# Altium PCB 20key.PcbDoc
Units mil, origin at the board's own origin, x right, y up, seen from the top; angles counter-clockwise.
Board outline 3000.01 x 4781.36 mil, 2 copper layers (Top Layer, Bottom Layer); 107 components, 117 nets, 460 pads, 115 vias.
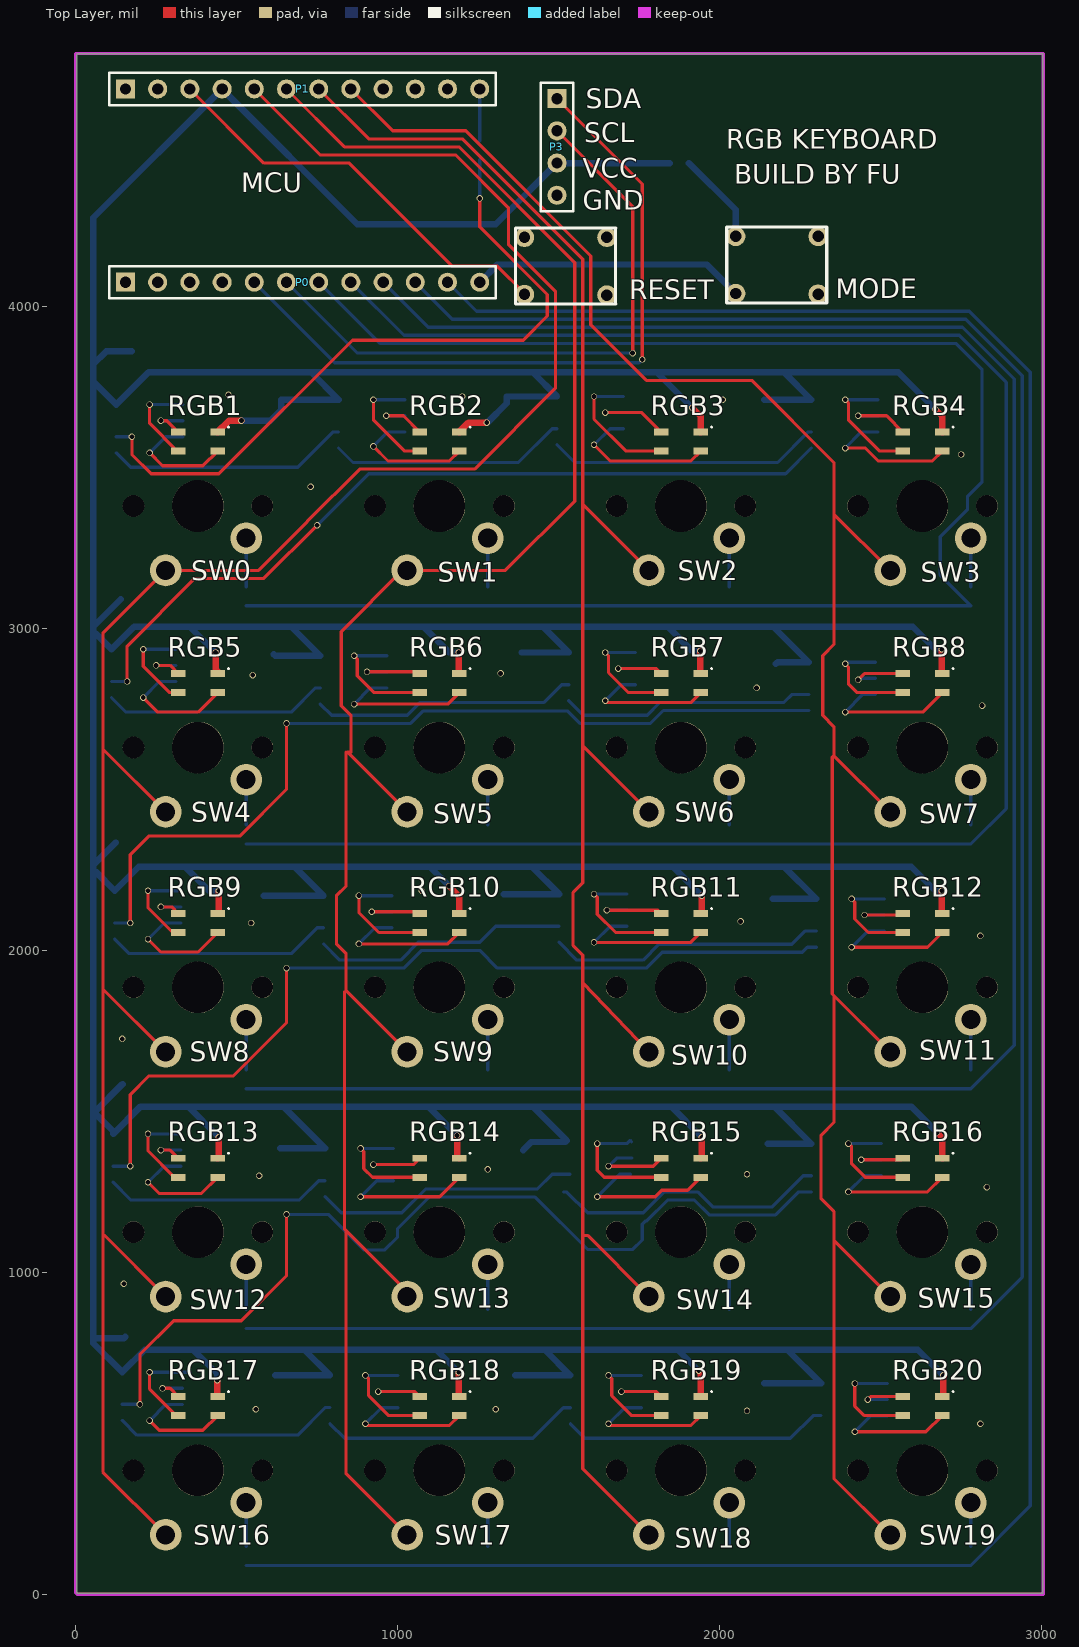
[diagram p0: Top Layer view]
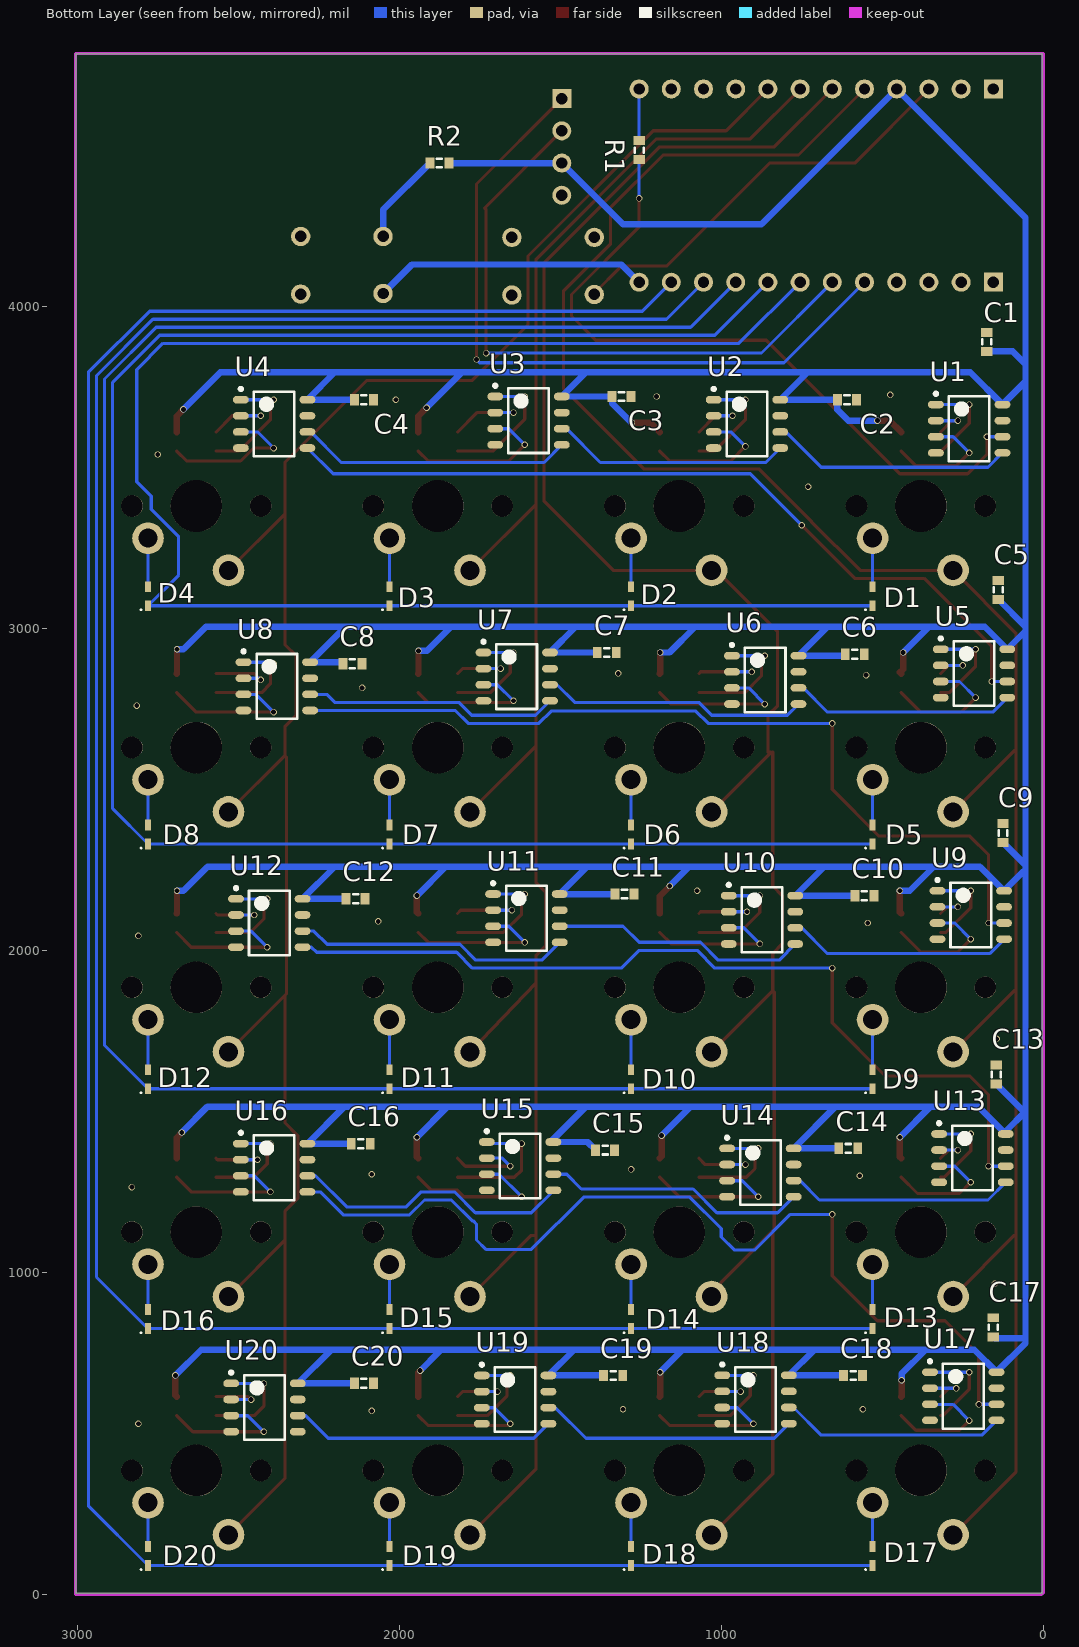
[diagram p1: Bottom Layer view, seen from below]

## Layer stack, top to bottom
Top Solder: solder mask 0.4, Solder Resist, Dk 3.5
Top Layer: signal copper 1.4
Dielectric 1: dielectric 12.6, FR-4, Dk 4.8
Bottom Layer: signal copper 1.4
Bottom Solder: solder mask 0.4, Solder Resist, Dk 3.5

## Board outline
3.74,3753.64 3.74,4785 3003.75,4785 3003.75,3.63 3.74,3.63

## Design rules (kind name [scope] priority, off if disabled: settings)
Clearance [All] p1: gap=15 ignorepadtopadclearanceinfootprint=TRUE
ComponentClearance [All] p1 off: gap=10 collisioncheckmode=3 verticalgap=10 showdistances=FALSE
PolygonConnect [All] p1: connectstyle=Relief reliefconductorwidth=10 reliefentries=4 polygonreliefangle="90 Angle" airgapwidth=10
RoutingVias [All] p1: holewidth=10 width=6 viastyle="Through Hole" minholewidth=10 minwidth=6 maxholewidth=10 maxwidth=6
SolderMaskExpansion [All] p1: expansion=4
Width [All] p1: maxlimit=50 minlimit=6 preferedwidth=10
29 further rules are at their usual default settings.

## Components (designator, comment, footprint, x,y, rotation, side; value= is the part's Value field where it differs from the comment)
C1 "C" PCBComponent_1#1 175,3890 r90 bottom value=100nF
C2 "C" PCBComponent_1#1 609.06,3710 r180 bottom value=100nF
C3 "C" PCBComponent_1#1 1309.06,3720 r180 bottom value=100nF
C4 "C" PCBComponent_1#1 2109.06,3710 r180 bottom value=100nF
C5 "C" PCBComponent_1#1 140,3120 r90 bottom value=100nF
C6 "C" PCBComponent_1#1 585,2920 r180 bottom value=100nF
C7 "C" PCBComponent_1#1 1355,2925 r180 bottom value=100nF
C8 "C" PCBComponent_1#1 2145,2890 r180 bottom value=100nF
C9 "C" PCBComponent_1#1 125,2365 r90 bottom value=100nF
C10 "C" PCBComponent_1#1 555,2170 r180 bottom value=100nF
C11 "C" PCBComponent_1#1 1300,2175 r180 bottom value=100nF
C12 "C" PCBComponent_1#1 2135,2160 r180 bottom value=100nF
C13 "C" PCBComponent_1#1 145.95,1615 r90 bottom value=100nF
C14 "C" PCBComponent_1#1 605,1385 r180 bottom value=100nF
C15 "C" PCBComponent_1#1 1360,1380 r180 bottom value=100nF
C16 "C" PCBComponent_1#1 2119.06,1400 r180 bottom value=100nF
C17 "C" PCBComponent_1#1 155,830 r90 bottom value=100nF
C18 "C" PCBComponent_1#1 590,680 r180 bottom value=100nF
C19 "C" PCBComponent_1#1 1335,680 r180 bottom value=100nF
C20 "C" PCBComponent_1#1 2109.06,655.47 r180 bottom value=100nF
D1 "Diode" SODFL160X77-2M 530,3100 r90 bottom
D2 "Diode" SODFL160X77-2M 1280,3100 r90 bottom
D3 "Diode" SODFL160X77-2M 2030,3100 r90 bottom
D4 "Diode" SODFL160X77-2M 2780,3100 r90 bottom
D5 "Diode" SODFL160X77-2M 530,2360 r90 bottom
D6 "Diode" SODFL160X77-2M 1280,2360 r90 bottom
D7 "Diode" SODFL160X77-2M 2030,2360 r90 bottom
D8 "Diode" SODFL160X77-2M 2780,2360 r90 bottom
D9 "Diode" SODFL160X77-2M 530,1600 r90 bottom
D10 "Diode" SODFL160X77-2M 1280,1600 r90 bottom
D11 "Diode" SODFL160X77-2M 2030,1600 r90 bottom
D12 "Diode" SODFL160X77-2M 2780,1600 r90 bottom
D13 "Diode" SODFL160X77-2M 530,855 r90 bottom
D14 "Diode" SODFL160X77-2M 1280,855 r90 bottom
D15 "Diode" SODFL160X77-2M 2030,855 r90 bottom
D16 "Diode" SODFL160X77-2M 2780,855 r90 bottom
D17 "Diode" SODFL160X77-2M 530,119.53 r90 bottom
D18 "Diode" SODFL160X77-2M 1280,119.53 r90 bottom
D19 "Diode" SODFL160X77-2M 2030,119.53 r90 bottom
D20 "Diode" SODFL160X77-2M 2780,119.53 r90 bottom
MODE "key" PCBComponent_1#2 2022.44,4010.47 r0 top
P0 "Header 12" HDR1X12 155,4075 r0 top
P1 "Header 12" HDR1X12 155,4675 r0 top
P3 "Header 4" HDR1X4 1495,4645 r270 top
R1 "Res3" J1-0603 1255,4485 r270 bottom value=1K
R2 "Res3" J1-0603 1875,4445 r0 bottom value=1K
RESET "key" PCBComponent_1#2 1366.54,4007.44 r0 top (schematic designator reset)
RGB1 "1206RGB" CAC-150P150X300-4M 380,3580 r0 top
RGB2 "1206RGB" CAC-150P150X300-4M 1130,3580 r0 top
RGB3 "1206RGB" CAC-150P150X300-4M 1880,3580 r0 top
RGB4 "1206RGB" CAC-150P150X300-4M 2630,3580 r0 top
RGB5 "1206RGB" CAC-150P150X300-4M 380,2830 r0 top
RGB6 "1206RGB" CAC-150P150X300-4M 1130,2830 r0 top
RGB7 "1206RGB" CAC-150P150X300-4M 1880,2830 r0 top
RGB8 "1206RGB" CAC-150P150X300-4M 2630,2830 r0 top
RGB9 "1206RGB" CAC-150P150X300-4M 380,2085 r0 top
RGB10 "1206RGB" CAC-150P150X300-4M 1130,2085 r0 top
RGB11 "1206RGB" CAC-150P150X300-4M 1880,2085 r0 top
RGB12 "1206RGB" CAC-150P150X300-4M 2630,2085 r0 top
RGB13 "1206RGB" CAC-150P150X300-4M 380,1325 r0 top
RGB14 "1206RGB" CAC-150P150X300-4M 1130,1325 r0 top
RGB15 "1206RGB" CAC-150P150X300-4M 1880,1325 r0 top
RGB16 "1206RGB" CAC-150P150X300-4M 2630,1325 r0 top
RGB17 "1206RGB" CAC-150P150X300-4M 380,585 r0 top
RGB18 "1206RGB" CAC-150P150X300-4M 1130,585 r0 top
RGB19 "1206RGB" CAC-150P150X300-4M 1880,585 r0 top
RGB20 "1206RGB" CAC-150P150X300-4M 2630,585 r0 top
SW0 "MX_SW" MX_SW-4 380,3380 r0 top
SW1 "MX_SW" MX_SW-4 1130,3380 r0 top
SW2 "MX_SW" MX_SW-4 1880,3380 r0 top
SW3 "MX_SW" MX_SW-4 2630,3380 r0 top
SW4 "MX_SW" MX_SW-4 380,2630 r0 top
SW5 "MX_SW" MX_SW-4 1130,2630 r0 top
SW6 "MX_SW" MX_SW-4 1880,2630 r0 top
SW7 "MX_SW" MX_SW-4 2630,2630 r0 top
SW8 "MX_SW" MX_SW-4 380,1885 r0 top
SW9 "MX_SW" MX_SW-4 1130,1885 r0 top
SW10 "MX_SW" MX_SW-4 1880,1885 r0 top
SW11 "MX_SW" MX_SW-4 2630,1885 r0 top
SW12 "MX_SW" MX_SW-4 380,1125 r0 top
SW13 "MX_SW" MX_SW-4 1130,1125 r0 top
SW14 "MX_SW" MX_SW-4 1880,1125 r0 top
SW15 "MX_SW" MX_SW-4 2630,1125 r0 top
SW16 "MX_SW" MX_SW-4 380,385 r0 top
SW17 "MX_SW" MX_SW-4 1130,385 r0 top
SW18 "MX_SW" MX_SW-4 1880,385 r0 top
SW19 "MX_SW" MX_SW-4 2630,385 r0 top
U1 "TM1913" SOP127P600X175-8L 230,3620 r180 bottom
U2 "TM1913" SOP127P600X175-8L 920,3635 r180 bottom
U3 "TM1913" SOP127P600X175-8L 1598.35,3645 r180 bottom
U4 "TM1913" SOP127P600X175-8L 2388.35,3635 r180 bottom
U5 "TM1913" SOP127P600X175-8L 215,2860 r180 bottom
U6 "TM1913" SOP127P600X175-8L 863.35,2840 r180 bottom
U7 "TM1913" SOP127P600X175-8L 1635,2850 r180 bottom
U8 "TM1913" SOP127P600X175-8L 2380,2820 r180 bottom
U9 "TM1913" SOP127P600X175-8L 225,2110 r180 bottom
U10 "TM1913" SOP127P600X175-8L 873.35,2095 r180 bottom
U11 "TM1913" SOP127P600X175-8L 1605,2100 r180 bottom
U12 "TM1913" SOP127P600X175-8L 2403.35,2085 r180 bottom
U13 "TM1913" SOP127P600X175-8L 220,1355 r180 bottom
U14 "TM1913" SOP127P600X175-8L 878.35,1310 r180 bottom
U15 "TM1913" SOP127P600X175-8L 1624.51,1330 r180 bottom
U16 "TM1913" SOP127P600X175-8L 2388.35,1325 r180 bottom
U17 "TM1913" SOP127P600X175-8L 248.35,615.47 r180 bottom
U18 "TM1913" SOP127P600X175-8L 893.35,605.47 r180 bottom
U19 "TM1913" SOP127P600X175-8L 1640,605 r180 bottom
U20 "TM1913" SOP127P600X175-8L 2418.35,580.47 r180 bottom

## Footprints (in the part's own frame and the unit in brackets; to place one, negate y for a bottom-side part, rotate by r counter-clockwise, add the part's x,y. Pads: shape width x height; smd on the part's side, far side on the other; paste and mask are expansions set on the pad)
CAC-150P150X300-4M [mm] "Chip Array, Concave, 4-Leads, Pitch 1.50mm,  Body 1.50x3.00mm,  IPC Low Density"
  rect 1.15x0.55 smd: 1(1.55,0.75) 2(1.55,-0.75) 3(-1.55,0.75) 4(-1.55,-0.75)
  silkscreen extent 2.36,1.09 2.46,1.19, body extent -1.55,-0.8 1.55,0.8, height 0.7
HDR1X4 [mm] "Connector; Header; 4 Position"
  rect 1.5x1.5 hole 0.9: 1(0,0)
  round 1.5 hole 0.9: 2(2.54,0) 3(5.08,0) 4(7.62,0)
  silkscreen extent -1.27,-1.27 8.89,1.27
HDR1X12 [mm] "Connector; Header; 12 Position"
  rect 1.5x1.5 hole 0.9: 1(0,0)
  round 1.5 hole 0.9: 2(2.54,0) 3(5.08,0) 4(7.62,0) 5(10.16,0) 6(12.7,0) 7(15.24,0) 8(17.78,0) 9(20.32,0) 10(22.86,0) 11(25.4,0) 12(27.94,0)
  silkscreen extent -1.27,-1.27 29.21,1.27
J1-0603 [mm] "Chip Resistor, Body 1.6x0.8mm, IPC High Density"
  rect 0.7x0.9 smd: 1(-0.75,0) 2(0.75,0)
  silkscreen extent -0.2,-0.35 0.2,0.35, body extent -0.85,-0.48 0.85,0.48, height 0.9
MX_SW-4 [mil] "with Fixation pins  1-Pole"
  round 98.43 hole 59.06: 1(150,-100) 2(-100,-200)
  round 67 hole 67: ""(-200,0) ""(200,0)
  round 160 hole 160: ""(0,0)
PCBComponent_1#1 [mm]
  rect 0.7x0.9 smd: 1(-0.762,0) 2(0.738,0)
  silkscreen extent -0.21,-0.35 0.19,0.35, body extent -0.86,-0.48 0.84,0.47, height 0.9
PCBComponent_1#2 [mm]
  round 1.524 hole 0.9: 1(0.7,5.25) 2(7.2,5.25) 3(0.7,0.75) 4(7.2,0.7)
  silkscreen extent 0,0 7.9,6
SODFL160X77-2M [mm] "SODFL, 2-Leads, Body 0.80x1.60mm, IPC Low Density"
  rect 0.85x0.5 smd: 1(-0.75,0) 2(0.75,0)
  silkscreen extent -1.12,0.5 -1.03,0.6, body extent -0.65,-0.43 0.65,0.43, height 0.77
SOP127P600X175-8L [mm] "SOP, 8-Leads, Body 4.90x3.90mm, Pitch 1.27mm, IPC High Density"
  oval 1.25x0.6 smd: 1(-2.625,1.905) 2(-2.625,0.635) 3(-2.625,-0.635) 4(-2.625,-1.905) 5(2.625,-1.905) 6(2.625,-0.635) 7(2.625,0.635) 8(2.625,1.905)
  silkscreen extent -2.75,-2.55 1.6,2.88, body extent -2,-2.55 2,2.55, height 1.75

## Part data
D1 D2 D3 D4 D5 D6 D7 D8 D9 D10 D11 D12 D13 D14 D15 D16 D17 D18 D19 D20: library part Diode_1, "Default Diode", Code_JEDEC=DO-214-AB, LatestRevisionDate=17-Jul-2002, LatestRevisionNote="Re-released for DXP Platform.", PackageDescription="DO-214-AB/SMC; 2 C-Bend Leads; Body 7.9 x 5.9 mm, inc. leads (LxW)", PackageReference=SMC, PackageVersion=Sep-1996, Published=8-Jun-2000, Publisher="Altium Limited"
P0 P1: "Header, 12-Pin", LatestRevisionDate=17-Jul-2002, LatestRevisionNote="Re-released for DXP Platform.", Publisher="Altium Limited"
P3: "Header, 4-Pin", LatestRevisionDate=17-Jul-2002, LatestRevisionNote="Re-released for DXP Platform.", Publisher="Altium Limited"
R1 R2: "Resistor", LatestRevisionDate=29-May-2009, LatestRevisionNote="IPC-7351 Footprint Added.", PackageDescription="Chip Resistor", PackageReference=J1-0603, Published=8-Jun-2000, Publisher="Altium Limited"
SW0 SW1 SW2 SW3 SW4 SW5 SW6 SW7 SW8 SW9 SW10 SW11 SW12 SW13 SW14 SW15 SW16 SW17 SW18 SW19: library part MX_SW-4, "with Fixation pins  1-Pole"
C1 C2 C3 C4 C5 C6 C7 C8 C9 C10 C11 C12 C13 C14 C15 C16 C17 C18 C19 C20: C=C*

## Via types
v1: diameter 20, hole 15, Top Layer to Bottom Layer, 115 vias

## Nets (pads, with @x,y where several pads share a name; then routed paths per layer and width w, separated by ;. In a path a pad name is that pad's centre, name@x,y a point inside that pad or via, vN(x,y) a via of type N, cw(c..) or ccw(c..) an arc to the next point about the centre after c; other vN are vias at no path point)
col1: P1.5 SW0.2 SW4.2 SW8.2 SW12.2 SW16.2 | length 6985.5
  Top Layer w10: SW16.2 85,380 85,1115 ; SW12.2 90,1115 85,1115 ; SW8.2 90,1875 85,1875 ; SW4.2 90,2620 85,2620 ; P1.5 760,4470 1180.36,4470 1344.09,4306.26 1344.09,4193.03 1490,4047.13 1490,3745.36 1239.29,3494.65 882.22,3494.65 720,3332.43 720,3331.57 568.43,3180 SW0.2 85,2985 85,2620 ; 85,1115 85,1875 ; 85,1875 85,2620
col2: P1.6 SW1.2 SW5.2 SW9.2 SW13.2 SW17.2 | length 6501
  Top Layer w10: P1.6 835,4495 1190.71,4495 1550,4135.71 1550,3395 1335,3180 SW1.2 1015,3180 825,2990 825,2760 855,2730 855,2615 845,2615 SW5.2 ; 840,2615 840,2200 810,2170 810,2020 840,1990 840,1875 ; SW17.2 840,375 840,1130 ; SW13.2 1030,940 840,1130 ; SW9.2 840,1875 ; 840,1130 835,1135 835,1870 840,1875
col3: P1.7 SW2.2 SW6.2 SW10.2 SW14.2 SW18.2 | length 6270.5
  Top Layer w10: P1.7 910,4520 1201.07,4520 1575,4146.07 1575,3385 ; SW18.2 1575,390 1575,1115 ; SW14.2 1590,1115 1575,1115 ; SW10.2 1575,1900 ; SW6.2 1575,2635 ; SW2.2 1575,3385 ; 1575,1115 1575,1900 ; 1575,1900 1575,1985 1545,2015 1545,2180 1575,2210 1575,2635 ; 1575,2635 1575,3385
col4: P1.8 SW3.2 SW7.2 SW11.2 SW15.2 SW19.2 | length 6564.9
  Top Layer w10: P1.8 985,4545 1211.42,4545 1600,4156.42 1600,3942.57 1772.57,3770 2100,3770 2355,3515 2355,3355 ; SW19.2 2355,360 2355,1100 ; SW15.2 2355,1100 ; SW11.2 2355,1860 ; SW7.2 2355,2605 ; SW3.2 2355,3355 ; 2355,1100 2355,1189.47 2314.47,1230 2314.47,1425 2355,1465.53 2355,1860 ; 2355,1860 2350,1865 2350,2600 2355,2605 ; 2355,2605 2355,2695 2320,2730 2320,2915 2355,2950 2355,3355
GND: C1.2 C2.2 C3.2 C4.2 C5.2 C6.2 C7.2 C8.2 C9.2 C10.2 C11.2 C12.2 C13.2 C14.2 C15.2 C16.2 C17.2 C18.2 C19.2 C20.2 MODE.4 P1.2 P3.4 RESET.4 U1.4 U2.4 U3.4 U4.4 U5.4 U6.4 U7.4 U8.4 U9.4 U10.4 U11.4 U12.4 U13.4 U14.4 U15.4 U16.4 U17.4 U18.4 U19.4 U20.4
  other v1: 2810,530 2085,570 560,575 1305,575 150,965 2830,1265 570,1300 2085,1305 1280,1320 145,1725 2810,2045 545,2085 2065,2090 1075,2185 2815,2760 2115,2815 550,2855 1320,2860 730,3440 2750,3540 2010,3710 1200.6,3720 475,3725
MODE: MODE.3 P0.12 | length 855.1
  Bottom Layer w20: P0.12 1310,4130 1960,4130 MODE.3
NetD1_2: D1.2 SW0.1 | length 150.5
  Bottom Layer w10: D1.2 SW0.1
NetD2_2: D2.2 SW1.1 | length 150.5
  Bottom Layer w10: D2.2 SW1.1
NetD3_2: D3.2 SW2.1 | length 150.5
  Bottom Layer w10: D3.2 SW2.1
NetD4_2: D4.2 SW3.1 | length 150.5
  Bottom Layer w10: D4.2 SW3.1
NetD5_2: D5.2 SW4.1 | length 140.5
  Bottom Layer w10: D5.2 SW4.1
NetD6_2: D6.2 SW5.1 | length 140.5
  Bottom Layer w10: D6.2 SW5.1
NetD7_2: D7.2 SW6.1 | length 140.5
  Bottom Layer w10: D7.2 SW6.1
NetD8_2: D8.2 SW7.1 | length 140.5
  Bottom Layer w10: D8.2 SW7.1
NetD9_2: D9.2 SW8.1 | length 155.5
  Bottom Layer w10: D9.2 SW8.1
NetD10_2: D10.2 SW9.1 | length 155.5
  Bottom Layer w10: D10.2 SW9.1
NetD11_2: D11.2 SW10.1 | length 155.5
  Bottom Layer w10: D11.2 SW10.1
NetD12_2: D12.2 SW11.1 | length 155.5
  Bottom Layer w10: D12.2 SW11.1
NetD13_2: D13.2 SW12.1 | length 140.5
  Bottom Layer w10: D13.2 SW12.1
NetD14_2: D14.2 SW13.1 | length 140.5
  Bottom Layer w10: D14.2 SW13.1
NetD15_2: D15.2 SW14.1 | length 140.5
  Bottom Layer w10: D15.2 SW14.1
NetD16_2: D16.2 SW15.1 | length 140.5
  Bottom Layer w10: D16.2 SW15.1
NetD17_2: D17.2 SW16.1 | length 135.9
  Bottom Layer w10: D17.2 SW16.1
NetD18_2: D18.2 SW17.1 | length 135.9
  Bottom Layer w10: D18.2 SW17.1
NetD19_2: D19.2 SW18.1 | length 135.9
  Bottom Layer w10: D19.2 SW18.1
NetD20_2: D20.2 SW19.1 | length 135.9
  Bottom Layer w10: D20.2 SW19.1
NetMODE_1: MODE.1 R2.2 | length 288.1
  Bottom Layer w20: R2.2 2050,4299.53 MODE.1
NetP1_3: P1.3 RESET.3 | length 1323
  Top Layer w10: P1.3 585,4445 850,4445 1170,4125 1310,4125 1395,4040 RESET.3@1415,4040
NetR1_2: R1.2 U1.6 | length 2193.6
  Top Layer w10: v1(175,3595) 175,3540 235,3480 445,3480 860,3895 1390,3895 1465,3970 1465,4036.77 1255,4246.77 v1(1255,4335)
  Bottom Layer w10: U1.6 v1(175,3595) ; v1(1255,4335) R1.2
NetRGB1_2: RGB1.2 U1.3 | length 370.5
  Top Layer w10: v1(230,3545) 270,3505 395.55,3505 RGB1.2
  Bottom Layer w10: v1(230,3545) 280,3595 U1.3
NetRGB1_3: RGB1.3 U1.2 | length 137
  Top Layer w10: v1(265,3645) 283.5,3645 RGB1.3
  Bottom Layer w10: v1(265,3645) U1.2
NetRGB1_4: RGB1.4 U1.1 | length 286.3
  Top Layer w10: v1(230,3695) 230,3636.76 316.28,3550.47 RGB1.4
  Bottom Layer w10: v1(230,3695) U1.1
NetRGB2_2: RGB2.2 U2.3 | length 414.6
  Top Layer w10: v1(925,3565) 970.35,3519.65 1160.2,3519.65 RGB2.2
  Bottom Layer w10: v1(925,3565) 970,3610 U2.3
NetRGB2_3: RGB2.3 U2.2 | length 183.2
  Top Layer w10: v1(965,3660) 1018.5,3660 RGB2.3
  Bottom Layer w10: v1(965,3660) U2.2
NetRGB2_4: RGB2.4 U2.1 | length 345
  Top Layer w10: v1(925,3710) 925,3647.57 1022.1,3550.47 RGB2.4
  Bottom Layer w10: v1(925,3710) U2.1
NetRGB3_2: RGB3.2 U3.3 | length 477.1
  Top Layer w10: v1(1610,3570) 1660.35,3519.65 1910.2,3519.65 RGB3.2
  Bottom Layer w10: v1(1610,3570) 1660,3620 U3.3
NetRGB3_3: RGB3.3 U3.2 | length 255.7
  Top Layer w10: v1(1645,3670) 1758.5,3670 RGB3.3
  Bottom Layer w10: v1(1645,3670) U3.2
NetRGB3_4: RGB3.4 U3.1 | length 411.9
  Top Layer w10: v1(1610,3720) 1610,3650 1709.53,3550.47 RGB3.4
  Bottom Layer w10: v1(1610,3720) U3.1
NetRGB4_2: RGB4.2 U4.3 | length 452.9
  Top Layer w10: v1(2390,3560) 2452.22,3560 2492.57,3519.65 2660.2,3519.65 RGB4.2
  Bottom Layer w10: v1(2390,3560) 2440,3610 U4.3
NetRGB4_3: RGB4.3 U4.2 | length 221.6
  Top Layer w10: v1(2430,3660) 2518.5,3660 RGB4.3
  Bottom Layer w10: v1(2430,3660) U4.2
NetRGB4_4: RGB4.4 U4.1 | length 377.5
  Top Layer w10: v1(2390,3710) 2400,3700 2400,3647.57 2497.1,3550.47 RGB4.4
  Bottom Layer w10: v1(2390,3710) U4.1
NetRGB5_2: RGB5.2 U5.3 | length 397.1
  Top Layer w10: v1(210,2785) 255,2740 380.55,2740 RGB5.2
  Bottom Layer w10: v1(210,2785) 260,2835 U5.3@311.69,2835
NetRGB5_3: RGB5.3 U5.2 | length 141.2
  Top Layer w10: v1(250,2885) 293.5,2885 RGB5.3
  Bottom Layer w10: v1(250,2885) U5.2@311.69,2885
NetRGB5_4: RGB5.4 U5.1 | length 297.1
  Top Layer w10: v1(210,2935) 210,2882.57 292.1,2800.47 RGB5.4
  Bottom Layer w10: v1(210,2935) U5.1@311.69,2935
NetRGB6_2: RGB6.2 U6.3 | length 463.1
  Top Layer w10: v1(865,2765) 1155.55,2765 RGB6.2
  Bottom Layer w10: v1(865,2765) 915,2815 U6.3
NetRGB6_3: RGB6.3 U6.2 | length 232.9
  Top Layer w10: v1(905,2865) 1063.5,2865 RGB6.3
  Bottom Layer w10: v1@900,2865 v1(905,2865) U6.2
NetRGB6_4: RGB6.4 U6.1 | length 388.8
  Top Layer w10: v1(865,2915) 875,2905 875,2852.57 927.1,2800.47 RGB6.4
  Bottom Layer w10: v1@860,2915 v1(865,2915) U6.1
NetRGB7_2: RGB7.2 U7.3 | length 425.1
  Top Layer w10: v1(1645,2775) 1650.35,2769.65 1910.2,2769.65 RGB7.2
  Bottom Layer w10: v1(1645,2775) 1695,2825 U7.3
NetRGB7_3: RGB7.3 U7.2 | length 193.7
  Top Layer w10: v1(1685,2875) 1803.5,2875 RGB7.3
  Bottom Layer w10: v1(1685,2875) U7.2
NetRGB7_4: RGB7.4 U7.1 | length 349.6
  Top Layer w10: v1(1645,2925) 1655,2915 1655,2862.57 1717.1,2800.47 RGB7.4
  Bottom Layer w10: v1(1645,2925) U7.1
NetRGB8_2: RGB8.2 U8.3 | length 442.2
  Top Layer w10: v1(2390,2740) 2630.55,2740 RGB8.2
  Bottom Layer w10: v1(2390,2740) 2445,2795 U8.3
NetRGB8_3: RGB8.3 U8.2 | length 202.5
  Top Layer w10: v1(2430,2840) 2449.53,2859.53 RGB8.3
  Bottom Layer w10: v1(2430,2840) 2435,2845 U8.2
NetRGB8_4: RGB8.4 U8.1 | length 342.2
  Top Layer w10: v1(2390,2890) 2400,2880 2400,2827.57 2427.1,2800.47 RGB8.4
  Bottom Layer w10: v1(2390,2890) 2395,2895 U8.1
NetRGB9_2: RGB9.2 U9.3 | length 380
  Top Layer w10: v1(225,2035) 265,1995 380.55,1995 RGB9.2
  Bottom Layer w10: v1(225,2035) 275,2085 U9.3@326.69,2085
NetRGB9_3: RGB9.3 U9.2 | length 124.1
  Top Layer w10: v1(265,2135) 298.5,2135 RGB9.3
  Bottom Layer w10: v1(265,2135) U9.2@326.69,2135
NetRGB9_4: RGB9.4 U9.1 | length 280
  Top Layer w10: v1(225,2185) 225,2132.57 302.1,2055.47 RGB9.4
  Bottom Layer w10: v1(225,2185) U9.1@326.69,2185
NetRGB10_2: RGB10.2 U10.3 | length 448.1
  Top Layer w10: v1(880,2020) 1155.55,2020 RGB10.2
  Bottom Layer w10: v1(880,2020) 930,2070 U10.3 U10.3@981.69,2070
NetRGB10_3: RGB10.3 U10.2 | length 212.9
  Top Layer w10: v1(920,2120) 1063.5,2120 RGB10.3
  Bottom Layer w10: v1(920,2120) U10.2 U10.2@981.69,2120
NetRGB10_4: RGB10.4 U10.1 | length 368.8
  Top Layer w10: v1(880,2170) 880,2117.57 942.1,2055.47 RGB10.4
  Bottom Layer w10: v1(880,2170) U10.1 U10.1@981.69,2170
NetRGB11_2: RGB11.2 U11.3 | length 466.3
  Top Layer w10: v1(1610,2025) 1610.35,2024.65 1910.2,2024.65 RGB11.2
  Bottom Layer w10: v1(1610,2025) 1660,2075 U11.3 U11.3@1711.69,2075
NetRGB11_3: RGB11.3 U11.2 | length 235
  Top Layer w10: v1(1650,2125) 1808.5,2125 RGB11.3
  Bottom Layer w10: v1(1650,2125) U11.2 U11.2@1711.69,2125
NetRGB11_4: RGB11.4 U11.1 | length 390.9
  Top Layer w10: v1(1610,2175) 1620,2165 1620,2112.57 1677.1,2055.47 RGB11.4
  Bottom Layer w10: v1(1610,2175) U11.1 U11.1@1711.69,2175
NetRGB12_2: RGB12.2 U12.3 | length 422.3
  Top Layer w10: v1(2410,2010) 2645.55,2010 RGB12.2
  Bottom Layer w10: v1(2410,2010) 2460,2060 U12.3 U12.3@2511.69,2060
NetRGB12_3: RGB12.3 U12.2 | length 182.5
  Top Layer w10: v1(2450,2110) 2564.45,2110 RGB12.3
  Bottom Layer w10: v1(2450,2110) U12.2 U12.2@2511.69,2110
NetRGB12_4: RGB12.4 U12.1 | length 334.7
  Top Layer w10: v1(2410,2160) 2420,2150 2420,2097.57 2462.1,2055.47 RGB12.4
  Bottom Layer w10: v1(2410,2160) U12.1 U12.1@2511.69,2160
NetRGB13_2: RGB13.2 U13.3 | length 373.8
  Top Layer w10: v1(225,1280) 260,1245 390.55,1245 RGB13.2
  Bottom Layer w10: v1(225,1280) 275,1330 U13.3 U13.3@326.69,1330
NetRGB13_3: RGB13.3 U13.2 | length 126.2
  Top Layer w10: v1(265,1380) 293.5,1380 RGB13.3
  Bottom Layer w10: v1(265,1380) U13.2 U13.2@326.69,1380
NetRGB13_4: RGB13.4 U13.1 | length 282.1
  Top Layer w10: v1(225,1430) 225,1377.57 307.1,1295.47 RGB13.4
  Bottom Layer w10: v1(225,1430) U13.1 U13.1@326.69,1430
NetRGB14_2: RGB14.2 U14.3 | length 453.5
  Top Layer w10: v1(885,1235) 1130.55,1235 RGB14.2
  Bottom Layer w10: v1(885,1235) 935,1285 U14.3 U14.3@986.69,1285
NetRGB14_3: RGB14.3 U14.2 | length 213.8
  Top Layer w10: v1(925,1335) 1049.45,1335 RGB14.3
  Bottom Layer w10: v1(925,1335) U14.2 U14.2@986.69,1335
NetRGB14_4: RGB14.4 U14.1 | length 353.5
  Top Layer w10: v1(885,1385) 895,1375 895,1322.57 922.1,1295.47 RGB14.4
  Bottom Layer w10: v1(885,1385) U14.1 U14.1@986.69,1385
NetRGB15_2: RGB15.2 U15.3 | length 478.4
  Top Layer w10: v1(1620,1235) 1800,1235 1820,1255 1900.55,1255 RGB15.2
  Bottom Layer w10: v1(1620,1235) 1690,1305 U15.3@1723.35,1305
NetRGB15_3: RGB15.3 U15.2 | length 257.3
  Top Layer w10: v1(1655,1330) 1794.45,1330 RGB15.3
  Bottom Layer w10: v1(1655,1330) 1680,1355 U15.2
NetRGB15_4: RGB15.4 U15.1 | length 403
  Top Layer w10: v1(1620,1400) 1620,1317.57 1642.1,1295.47 RGB15.4
  Bottom Layer w10: v1(1620,1400) 1711.92,1400 1721.92,1410 U15.1@1726.43,1405.49
NetRGB16_2: RGB16.2 U16.3 | length 432.3
  Top Layer w10: v1(2400,1250) 2645.55,1250 RGB16.2
  Bottom Layer w10: v1(2400,1250) 2450,1300 U16.3 U16.3@2501.69,1300
NetRGB16_3: RGB16.3 U16.2 | length 192.5
  Top Layer w10: v1(2440,1350) 2564.45,1350 RGB16.3
  Bottom Layer w10: v1(2440,1350) U16.2 U16.2@2501.69,1350
NetRGB16_4: RGB16.4 U16.1 | length 344.7
  Top Layer w10: v1(2400,1400) 2410,1390 2410,1337.57 2452.1,1295.47 RGB16.4
  Bottom Layer w10: v1(2400,1400) U16.1 U16.1@2501.69,1400
NetRGB17_2: RGB17.2 U17.3 | length 364.7
  Top Layer w10: v1(230,540) 260,510 395.55,510 RGB17.2
  Bottom Layer w10: v1(230,540) 280,590 U17.3@331.69,590
NetRGB17_3: RGB17.3 U17.2 | length 121.2
  Top Layer w10: v1(270,640) 293.5,640 RGB17.3
  Bottom Layer w10: v1(270,640) U17.2@331.69,640
NetRGB17_4: RGB17.4 U17.1 | length 300.4
  Top Layer w10: v1(230,690) 230,637.57 312.1,555.47 RGB17.4
  Bottom Layer w10: v1(230,690) U17.1@355,690
NetRGB18_2: RGB18.2 U18.3 | length 428.4
  Top Layer w10: v1(900,530) 905.35,524.65 1160.2,524.65 RGB18.2
  Bottom Layer w10: v1(900,530) 950,580 U18.3@1001.69,580
NetRGB18_3: RGB18.3 U18.2 | length 197.1
  Top Layer w10: v1(940,630) 1053.5,630 RGB18.3
  Bottom Layer w10: v1(940,630) U18.2@1001.69,630
NetRGB18_4: RGB18.4 U18.1 | length 353
  Top Layer w10: v1(900,680) 910,670 910,617.57 972.1,555.47 RGB18.4
  Bottom Layer w10: v1(900,680) U18.1@1001.69,680
NetRGB19_2: RGB19.2 U19.3 | length 423.4
  Top Layer w10: v1(1655,530) 1660.35,524.65 1910.2,524.65 RGB19.2
  Bottom Layer w10: v1(1655,530) 1705,580 U19.3@1756.69,580
NetRGB19_3: RGB19.3 U19.2 | length 192.1
  Top Layer w10: v1(1695,630) 1803.5,630 RGB19.3
  Bottom Layer w10: v1(1695,630) U19.2@1756.69,630
NetRGB19_4: RGB19.4 U19.1 | length 348
  Top Layer w10: v1(1655,680) 1665,670 1665,617.57 1727.1,555.47 RGB19.4
  Bottom Layer w10: v1(1655,680) U19.1@1756.69,680
NetRGB20_2: RGB20.2 U20.3 | length 414.3
  Top Layer w10: v1(2420,505) 2640.55,505 RGB20.2
  Bottom Layer w10: v1(2420,505) 2470,555 U20.3@2521.69,555
NetRGB20_3: RGB20.3 U20.2 | length 174.6
  Top Layer w10: v1(2460,605) 2469.53,614.53 RGB20.3
  Bottom Layer w10: v1(2460,605) U20.2@2521.69,605
NetRGB20_4: RGB20.4 U20.1 | length 332.9
  Top Layer w10: v1(2420,655) 2420,585 2449.53,555.47 RGB20.4
  Bottom Layer w10: v1(2420,655) U20.1@2521.69,655
NetU1_5: U1.5 U2.6 | length 754.2
  Bottom Layer w10: U1.5 171.65,3500 690,3500 800,3610 U2.6
NetU2_5: U2.5 U3.6 | length 740.5
  Bottom Layer w10: U2.5 861.65,3515 1375,3515 1480,3620 U3.6
NetU3_5: U3.5 U4.6 | length 852.1
  Bottom Layer w10: U3.5 1550,3515 2180,3515 2275,3610 U4.6
NetU4_5: U4.5 U5.6 | length 2538.1
  Top Layer w10: v1(160,2835) 160,2945 370,3155 585,3155 v1(750,3320)
  Bottom Layer w10: U5.6 v1(160,2835) ; v1(750,3320) 910,3480 2205,3480 U4.5
NetU5_5: U5.5 U6.6 | length 698.1
  Bottom Layer w10: U5.5 156.65,2740 670,2740 745,2815 U6.6
NetU6_5: U6.5 U7.6 | length 825.5
  Bottom Layer w10: U6.5 795,2730 1030,2730 1070,2770 1455,2770 1510,2825 U7.6
NetU7_5: U7.5 U8.6 | length 790.6
  Bottom Layer w10: U7.5 1576.65,2730 1775,2730 1815,2770 2200,2770 2225,2795 U8.6
NetU8_5: U8.5 U9.6 | length 2704.5
  Top Layer w10: v1(170,2085) 170,2297.37 227.63,2355 510,2355 655,2500 v1(655,2705)
  Bottom Layer w10: U9.6 v1(170,2085) ; v1(655,2705) 1040.36,2705 1078.54,2743.19 1528.11,2743.19 1566.3,2705 1785.36,2705 1825.36,2745 U8.5
NetU9_5: U9.5 U10.6 | length 700.1
  Bottom Layer w10: U9.5 166.65,1990 670,1990 750,2070 U10.6
NetU10_5: U10.5 U11.6 | length 795.9
  Bottom Layer w10: U10.5 820,1970 1009.38,1970 1064.38,2025 1255,2025 1305,2075 U11.6
NetU11_5: U11.5 U12.6 | length 858.4
  Bottom Layer w10: U11.5 1556.65,1970 1762.27,1970 1811.27,2019 2224,2019 2265,2060 U12.6
NetU12_5: U12.5 U13.6 | length 2740.4
  Top Layer w10: v1(170,1330) 170,1552.37 227.63,1610 490,1610 655,1775 v1(655,1945)
  Bottom Layer w10: U13.6 v1(170,1330) ; v1(655,1945) 1019.74,1945 1074.74,2000 1255,2000 1310,1945 1772.63,1945 1821.63,1994 2256.63,1994 2272.63,2010 U12.5
NetU13_5: U13.5 U14.6 | length 706
  Bottom Layer w10: U13.5 171.65,1225 695,1225 755,1285 U14.6
NetU14_5: U14.5 U15.6 | length 830.4
  Bottom Layer w10: U14.5 825,1185 1013.22,1185 1087.22,1259 1434,1259 1480,1305 U15.6 U15.6@1535,1305
NetU15_5: U15.5 U16.6 | length 882.3
  Bottom Layer w10: U15.5@1515.58,1249.42 1525.58,1249.42 1590,1185 1763.22,1185 1828.22,1250 1931.78,1250 1978.28,1203.5 2163.5,1203.5 2260,1300 U16.6
NetU16_5: U16.5 U17.6 | length 2924.3
  Top Layer w10: v1(200,590) 200,745 305,850 515,850 655,990 v1(655,1180)
  Bottom Layer w10: U17.6 199.53,590.47 v1(200,590) ; v1(655,1180) 785,1180 895,1070 960,1070 1000,1110 1000,1136.42 1097.58,1234 1427.16,1234 1589.66,1071.5 1730.84,1071.5 1760,1100.66 1760,1150 1770,1160 1773.58,1160 1838.58,1225 1921.42,1225 1967.92,1178.5 2173.86,1178.5 2245.36,1250 U16.5
NetU17_5: U17.5 U18.6 | length 699.2
  Bottom Layer w10: U17.5 190.47,495 690,495 775.47,580.47 U18.6
NetU18_5: U18.5 U19.6 | length 804.8
  Bottom Layer w10: U18.5 835.47,485 1420,485 1515,580 U19.6
NetU19_5: U19.5 U20.6 | length 826.2
  Bottom Layer w10: U19.5 1581.65,485 2220,485 2290.47,555.47 U20.6
RGBLED: P1.12 R1.1 | length 160.5
  Bottom Layer w10: R1.1 P1.12
row1: D1.1 D2.1 D3.1 D4.1 P0.7 | length 5248.7
  Bottom Layer w10: D1.1 D2.1 D3.1 D4.1 2685,3165.47 2685,3285 2770,3370 2770,3410 2815,3455 2815,3803.58 2733.58,3885 945,3885 P0.7
row2: D5.1 D6.1 D7.1 D8.1 P0.8 | length 5892.9
  Bottom Layer w10: D5.1 D7.1 D8.1 2890,2440.47 2890,3763.93 2743.93,3910 1020,3910 P0.8
row3: D9.1 D10.1 D11.1 D12.1 P0.9 | length 6594.3
  Bottom Layer w10: D9.1 D10.1 D11.1 D12.1 2915,1705.47 2915,3774.29 2754.29,3935 1095,3935 P0.9
row4: D13.1 D14.1 D15.1 D16.1 P0.10 | length 7280.7
  Bottom Layer w10: D13.1 D14.1 D15.1 D16.1 2940,985.47 2940,3784.64 2764.64,3960 1170,3960 P0.10
row5: D17.1 D18.1 D19.1 D20.1 P0.11 | length 7957.6
  Bottom Layer w10: D17.1 D18.1 D19.1 D20.1 2965,275 2965,3795 2775,3985 1245,3985 P0.11
SCL: P0.6 P3.2 | length 1957.6
  Top Layer w10: P3.2 1735,4305 1730,4300 v1(1730,3855)
  Bottom Layer w10: P0.6 875,3855 v1(1730,3855)
SDA: P0.5 P3.1 | length 2232.5
  Top Layer w10: P3.1 1760,4380 v1(1760,3835)
  Bottom Layer w10: P0.5 805,3825 1750,3825 v1(1760,3835)
VCC: C1.1 C2.1 C3.1 C4.1 C5.1 C6.1 C7.1 C8.1 C9.1 C10.1 C11.1 C12.1 C13.1 C14.1 C15.1 C16.1 C17.1 C18.1 C19.1 C20.1 P1.4 P3.3 R2.1 RGB1.1 RGB2.1 RGB3.1 RGB4.1 RGB5.1 RGB6.1 RGB7.1 RGB8.1 RGB9.1 RGB10.1 RGB11.1 RGB12.1 RGB13.1 RGB14.1 RGB15.1 RGB16.1 RGB17.1 RGB18.1 RGB19.1 RGB20.1 U1.8 U2.8 U3.8 U4.8 U5.8 U6.8 U7.8 U8.8 U9.8 U10.8 U11.8 U12.8 U13.8 U14.8 U15.8 U16.8 U17.8 U18.8 U19.8 U20.8 | length 27603.6
  Top Layer w20: v1(435,2925) 435,2873.5 445,2863.5 RGB5.1 ; v1(440,665) 440,615.55 RGB17.1 ; RGB13.1 445,1358.5 v1(445,1420) ; RGB9.1 445,2118.5 v1(445,2185) ; RGB1.1 476.5,3645 v1(515,3645) ; v1(1160,2200) 1160,2199.41 1191.02,2168.39 RGB10.1 ; v1(1185,1425) 1185,1360.55 RGB14.1 ; v1(1190,690) 1190,615.55 RGB18.1 ; v1(1190,2925) 1190,2860.55 RGB6.1 ; RGB2.1 1220.5,3639 v1(1277,3639) ; v1(1915,3685) 1941.02,3658.98 RGB3.1 ; v1(1935,695) 1941.02,688.98 RGB19.1 ; v1(1940,2930) 1940,2860.55 RGB7.1 ; RGB15.1 1945,1358.5 v1(1945,1420) ; RGB11.1 1945,2118.5 v1(1945,2170) ; v1(2670,3680) 2691.02,3658.98 RGB4.1 ; v1(2675,1434.41) 2691.02,1418.39 RGB16.1 ; v1(2690,2185) 2690,2115.55 RGB12.1 ; v1(2690,2935) 2690,2860.55 RGB8.1 ; RGB20.1 2695,618.5 v1(2695,680)
  Bottom Layer w20: C9.1 55,2265 ; C5.1 55,3005 ; C13.1 60.95,1500 55,1500 ; C17.1 150,795 55,795 ; C1.1 95,3860 55,3820 ; v1(435,2925) 355,3005 ; v1(440,665) 440,685 365,760 ; v1(445,1420) 350,1515 ; v1(445,2185) 414.41,2185 340,2259.41 340,2260 ; v1(515,3645) 605,3645 639.06,3679.06 C2.1 U2.8 731.65,3795 ; C10.1 U10.8 680,2260 ; C6.1 620,2915 U6.8 670,3005 ; C18.1 620.47,680.47 U18.8 710.47,760 ; C14.1 U14.8 645,1515 ; v1(1160,2200) 1105,2255 1105,2260 ; v1(1185,1425) 1095,1515 ; v1(1190,690) 1120,760 ; v1(1190,2925) 1160.59,2925 1080.59,3005 ; v1(1277,3639) 1279,3639 1339.06,3699.06 C3.1 U3.8 1420,3795 ; C11.1 U11.8 1416.65,2260 ; C19.1 U19.8 1456.65,760 ; C7.1 U7.8 1451.65,3005 ; C15.1 1415,1405 U15.8 ; U15.8@1525.58,1409.42 1420,1515 ; R2.1 P3.3 1305,4255 875,4255 P1.4 55,4275 55,3820 ; v1(1915,3685) 1805,3795 ; v1(1935,695) 1875,755 1875,760 ; v1(1940,2930) 1914.41,2930 1845,2999.41 1845,3005 ; v1(1945,1420) 1850,1515 ; v1(1945,2170) 1855,2260 ; C20.1 U20.8 2210.47,760 ; C4.1 U4.8 2200,3795 ; C16.1 U16.8 2170,1515 ; C12.1 U12.8 2200,2260 ; C8.1 2180,2895 U8.8 2166.65,3005 ; v1(2670,3680) 2555,3795 2200,3795 ; v1(2675,1434.41) 2675.59,1434.41 2595,1515 2170,1515 ; v1(2690,2185) 2670,2185 2595,2260 2200,2260 ; v1(2690,2935) 2670,2935 2600,3005 2166.65,3005 ; v1(2695,680) 2615,760 2210.47,760 ; 55,795 55,1500 ; 55,795 55,780.47 U17.8 214.53,760 365,760 ; 55,1500 55,2245 ; 55,1500 116.65,1438.35 U13.8 201.65,1515 350,1515 ; 55,2245 61.65,2245 U9.8 196.65,2260 340,2260 ; 55,2245 55,2265 ; 55,2265 55,2985 ; 55,2985 55,3005 ; 55,2985 61.65,2985 U5.8 181.65,3005 355,3005 ; 55,3005 55,3765 ; 55,3765 55,3820 ; 55,3765 56.65,3765 U1.8 226.65,3795 731.65,3795 ; 340,2260 680,2260 ; 350,1515 645,1515 ; 355,3005 670,3005 ; 365,760 710.47,760 ; 645,1515 1095,1515 ; 670,3005 1080.59,3005 ; 680,2260 1105,2260 ; 710.47,760 1120,760 ; 731.65,3795 1420,3795 ; 1080.59,3005 1451.65,3005 ; 1095,1515 1420,1515 ; 1105,2260 1416.65,2260 ; 1120,760 1456.65,760 ; 1416.65,2260 1855,2260 ; 1420,1515 1850,1515 ; 1420,3795 1805,3795 ; 1451.65,3005 1845,3005 ; 1456.65,760 1875,760 ; 1805,3795 2200,3795 ; 1845,3005 2166.65,3005 ; 1850,1515 2170,1515 ; 1855,2260 2200,2260 ; 1875,760 2210.47,760
pads on no net: MODE.2 P0.1 P0.2 P0.3 P0.4 P1.1 P1.9 P1.10 P1.11 RESET.1 RESET.2 SW0. SW1. SW2. SW3. SW4. SW5. SW6. SW7. SW8. SW9. SW10. SW11. SW12. SW13. SW14. SW15. SW16. SW17. SW18. SW19. U1.7 U2.7 U3.7 U4.7 U5.7 U6.7 U7.7 U8.7 U9.7 U10.7 U11.7 U12.7 U13.7 U14.7 U15.7 U16.7 U17.7 U18.7 U19.7 U20.5 U20.7

## Polygon pours and split planes (outlines as drawn)
GND on Bottom Layer "NONET_L02_P002" (solid, shelved, pour order 2): 3.74,3753.64 3.74,4785 3003.75,4785 3003.75,3.63 3.74,3.63
GND on Top Layer "NONET_L01_P004" (solid, shelved, pour order 4): 3.74,3753.64 3.74,4785 3003.75,4785 3003.75,3.63 3.74,3.63

## Keep-outs
Keep-Out Layer:
  lines w10: 0,5 0,4785 3005,4785 3005,0 5,0 0,5

## Silkscreen, mask and mechanical layers (free items; w line width, h text height)
Top Overlay:
  text "SDA" at 1585,4615 h60
  text "SCL" at 1580,4510 h60
  text "RGB KEYBOARD" at 2020,4490 h60
  text "VCC" at 1575,4400 h60
  text "BUILD BY FU" at 2045,4380 h60
  text "MCU" at 515,4355 h60
  text "GND" at 1575,4300 h60